# Altium PCB PRJ_0110_AAAA.PcbDoc (part 1 of 2)
Units mm, origin at the board's own origin, x right, y up, seen from the top; angles counter-clockwise.
Board outline 81.4 x 49.8 mm, 4 copper layers (Top Layer, Layer 2, Layer 3, Bottom Layer), stack 1.578 mm thick; 107 components, 59 nets, 281 pads, 261 vias.
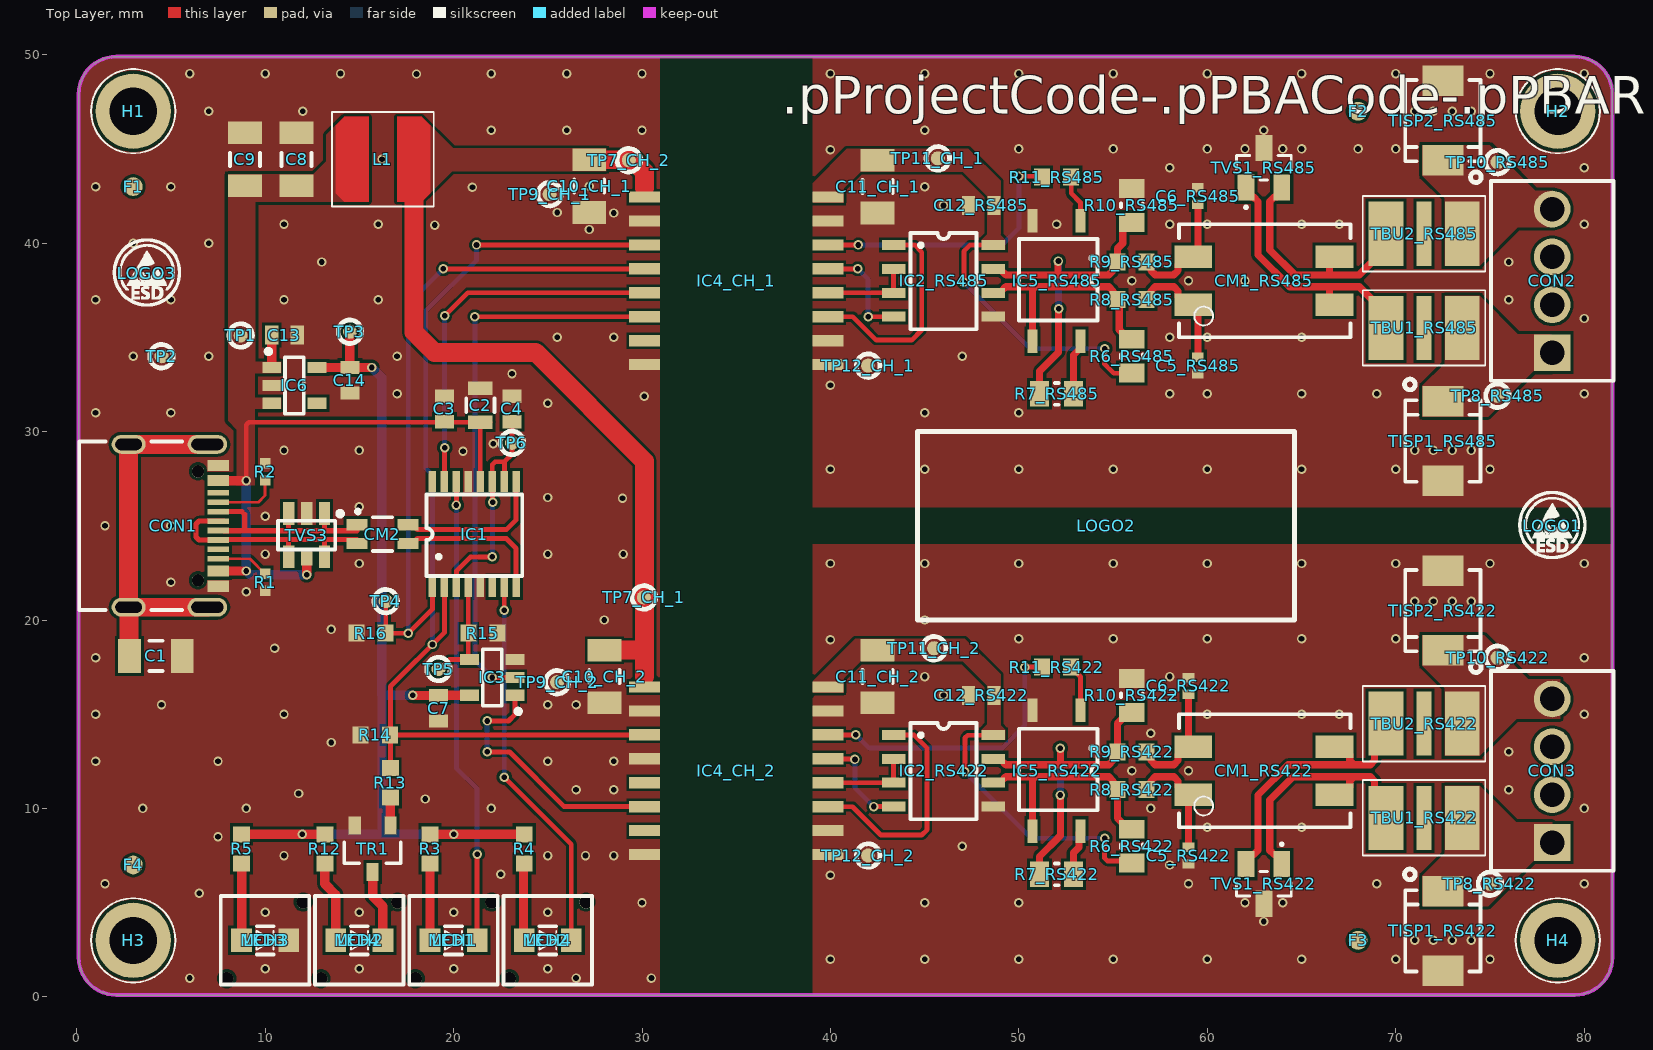
[diagram p0: Top Layer view]
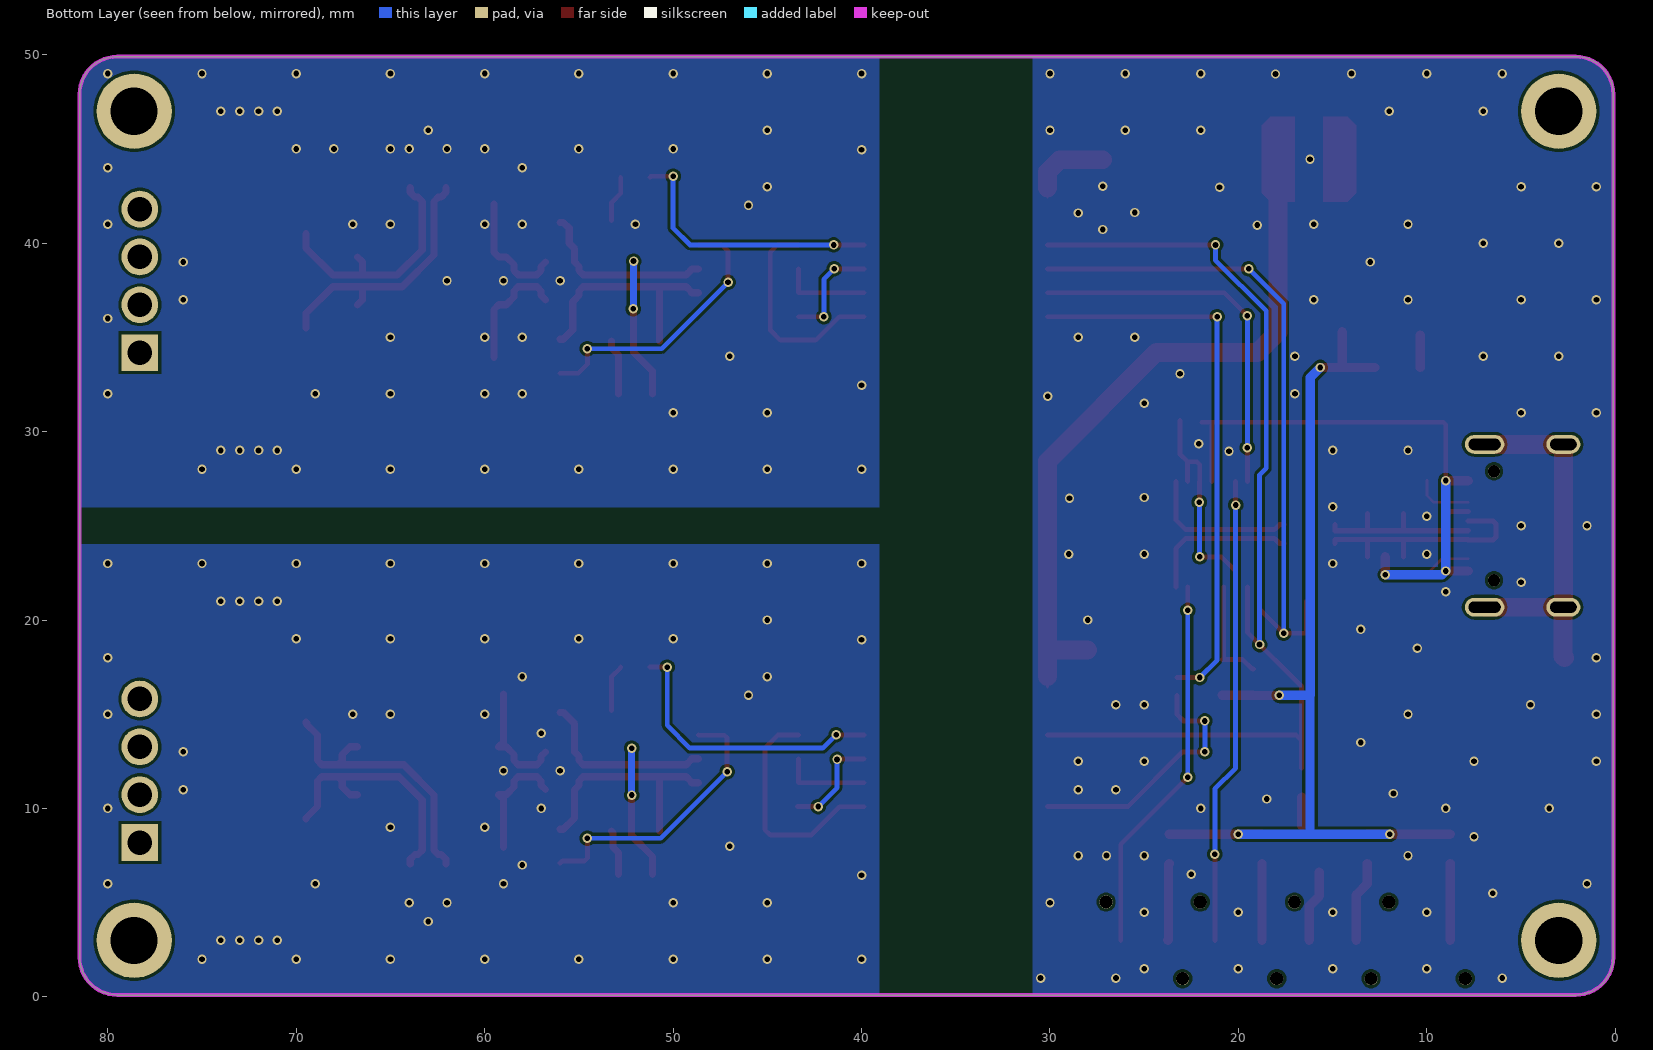
[diagram p1: Bottom Layer view, seen from below]
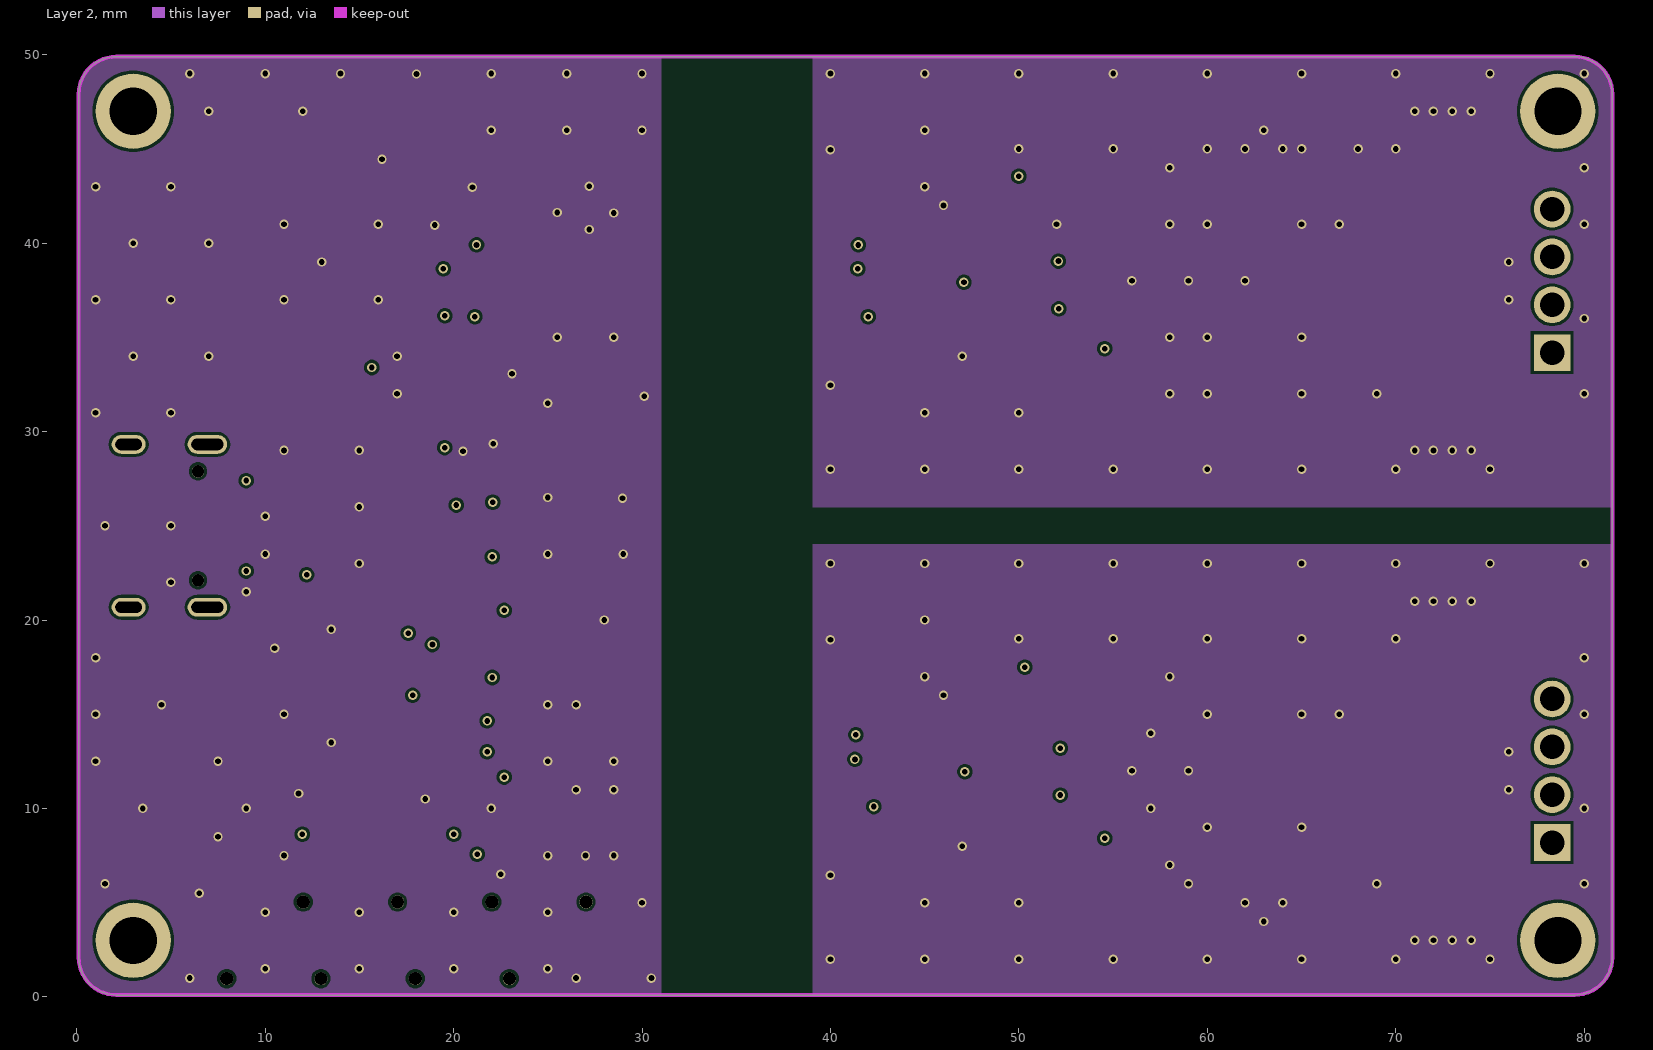
[diagram p2: Layer 2]
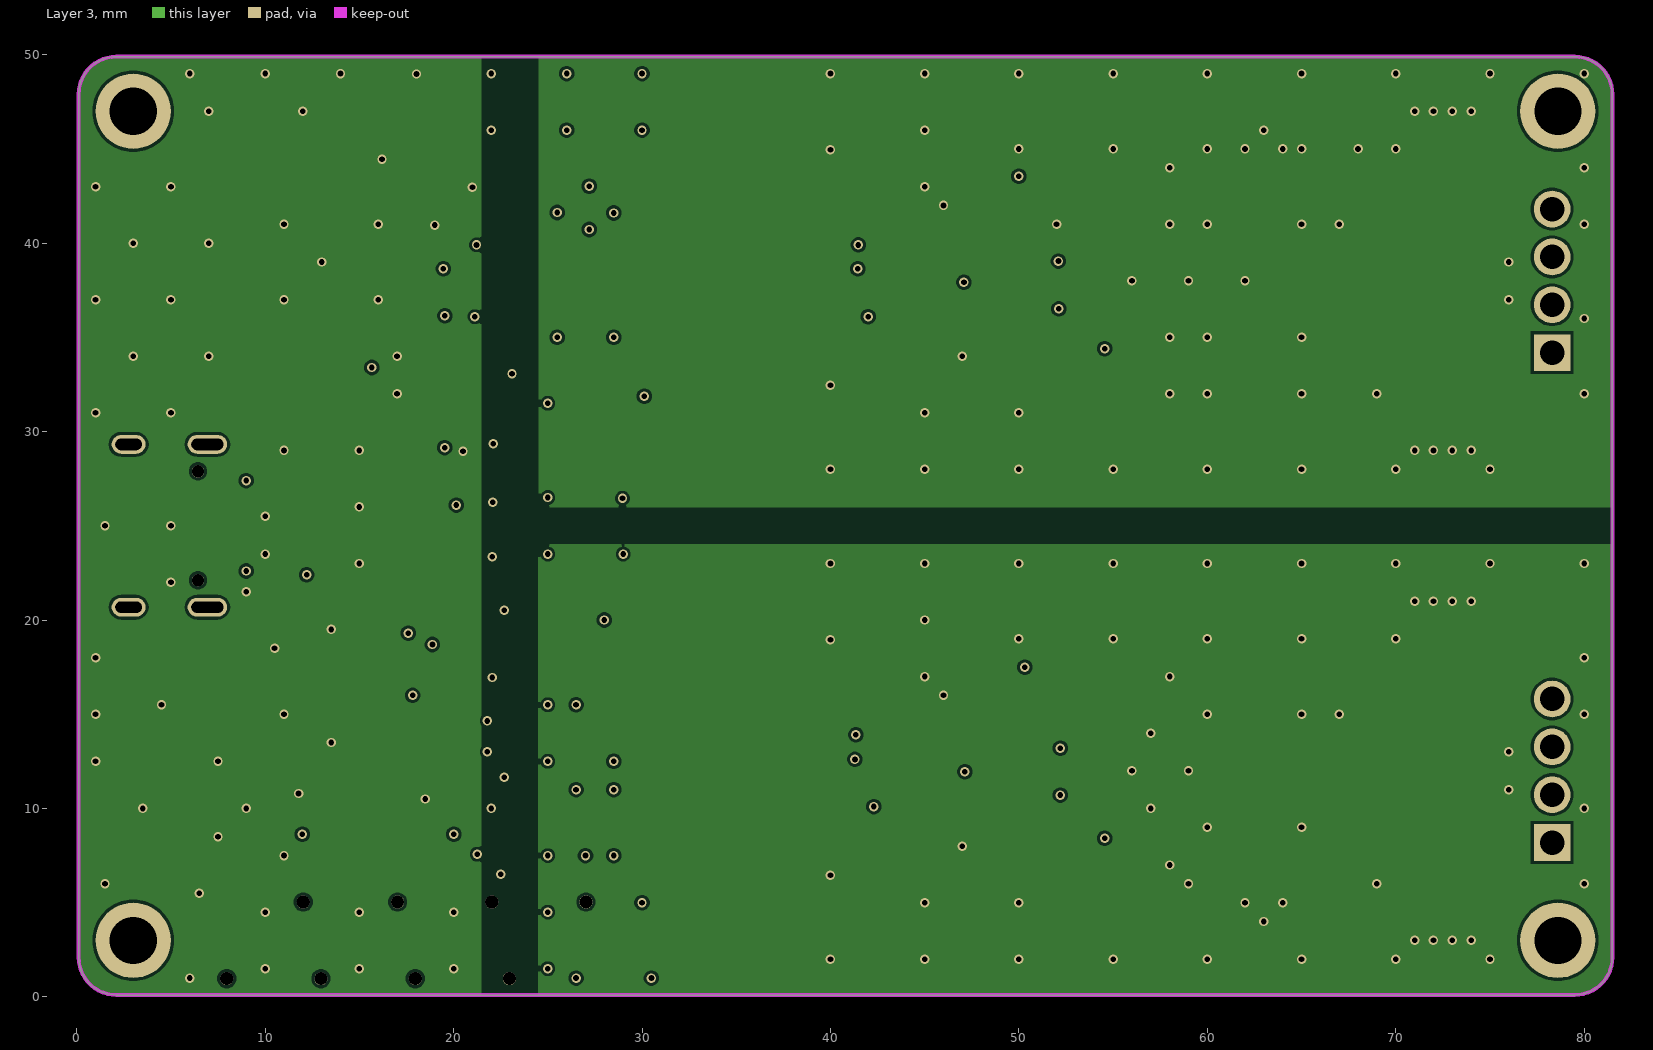
[diagram p3: Layer 3]
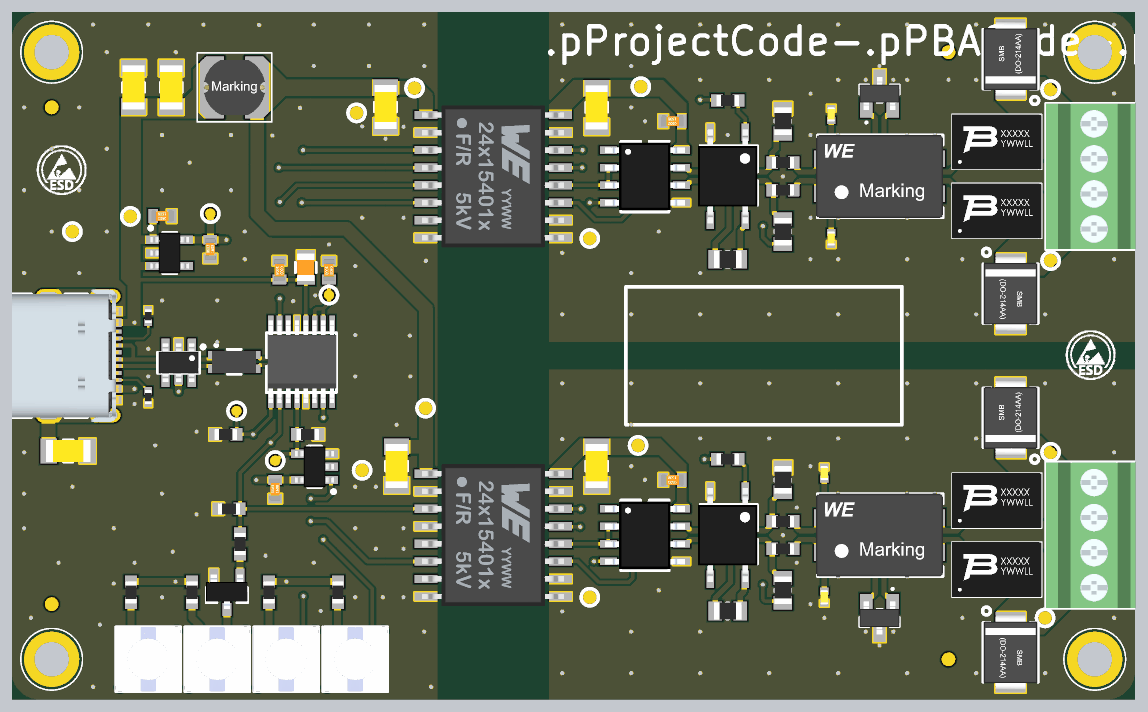
[diagram p5: 3D render of the assembled board from above, using the file's embedded part models]

## Layer stack, top to bottom
Top Solder: solder mask 0.0102, Solder Resist, Dk 3.5
Top Layer: signal copper 0.035
Dielectric 1: prepreg 0.107, PP-006, Dk 4.1
Dielectric 2: prepreg 0.0994, PP-006, Dk 4.1
Layer 2: signal copper 0.0152
Dielectric1: dielectric 1.065, FR-4, Dk 4.8
Layer 3: signal copper 0.0152
Dielectric 3: prepreg 0.0994, PP-006, Dk 4.1
Dielectric 4: prepreg 0.107, PP-006, Dk 4.1
Bottom Layer: signal copper 0.035
Bottom Solder: solder mask 0.0102, Solder Resist, Dk 3.5

## Board outline
0.1,2.1 ccw(c2.1,2.1) 2.1,0.1 79.5,0.1 ccw(c79.5,2.1) 81.5,2.1 81.5,47.9 ccw(c79.5,47.9) 79.5,49.9 2.1,49.9 ccw(c2.1,47.9) 0.1,47.9

## Design rules (kind name [scope] priority, off if disabled: settings)
Clearance [All] p1: gap=0.15 ignorepadtopadclearanceinfootprint=FALSE
DiffPairsRouting RS485_Rules [All] p1: maxlimit=0.254 minlimit=0.254 mostfreqgap=0.254 toplayer_minwidth=0.381 toplayer_maxwidth=0.381 toplayer_prefwidth=0.381 midlayer1_minwidth=0.381 midlayer1_maxwidth=0.381 midlayer1_prefwidth=0.381 midlayer2_minwidth=0.381 midlayer2_maxwidth=0.381 midlayer2_prefwidth=0.381 bottomlayer_minwidth=0.381 bottomlayer_maxwidth=0.381 bottomlayer_prefwidth=0.381 maxuncoupledlength=12.7
DiffPairsRouting USB_Rules [InDifferentialPairClass('USB')] p2: maxlimit=0.2 minlimit=0.2 mostfreqgap=0.2 toplayer_minwidth=0.27 toplayer_maxwidth=0.27 toplayer_prefwidth=0.27 midlayer1_minwidth=0.27 midlayer1_maxwidth=0.27 midlayer1_prefwidth=0.27 midlayer2_minwidth=0.27 midlayer2_maxwidth=0.27 midlayer2_prefwidth=0.27 bottomlayer_minwidth=0.27 bottomlayer_maxwidth=0.27 bottomlayer_prefwidth=0.27 maxuncoupledlength=12.7
FabricationTestPointUsage TestPointUsage [All] p1: valid=0 allowmultiple=FALSE
FabricationTestpoint Testpoint [All] p1: side=3 testpointundercomponent=TRUE minsize=1.016 maxsize=2.54 preferedsize=1.524 minholesize=0 maxholesize=1.016 preferedholesize=0.813 testpointgrid=0.025 allowsidetop=TRUE allowsidebottom=TRUE usegrid=TRUE gridtolerance=0
PlaneConnect [All] p1: planeconnectstyle=Direct reliefexpansion=0.508 reliefentries=4 reliefconductorwidth=0.254 reliefairgap=0.254
PolygonConnect [All] p1: connectstyle=Direct reliefconductorwidth=0.254 reliefentries=4 polygonreliefangle="90 Angle" airgapwidth=0.254
RoomDefinition RS485 [InComponentClass('RS485')] p1: confinementstyle=ConfineIn formatcopy=TRUE lockcomponents=FALSE outline -105.378,-92.424 -54.578,-92.424 -54.578,-67.024 -105.378,-67.024
RoomDefinition RS422 [InComponentClass('RS422')] p2: confinementstyle=ConfineIn formatcopy=TRUE lockcomponents=FALSE outline -105.378,-92.424 -54.578,-92.424 -54.578,-67.024 -105.378,-67.024
RoomDefinition "USB To UART" [InComponentClass('USB To UART')] p3: confinementstyle=ConfineIn formatcopy=TRUE lockcomponents=FALSE outline 118.777,-16.605 164.319,-16.605 164.319,-5.378 118.777,-5.378
RoutingLayers [All] p1: top layer_v5=TRUE mid layer 1_v5=FALSE mid layer 2_v5=FALSE bottom layer_v5=TRUE
RoutingVias [All] p1: holewidth=0.3 width=0.5 viastyle="Through Hole" minholewidth=0.3 minwidth=0.5 maxholewidth=0.711 maxwidth=1.27
SilkToSolderMaskClearance SilkscreenOverComponentPads [IsPad] p1: minsilkscreentomaskgap=0.254 clearancetoexposedcopper=TRUE
SolderMaskExpansion SolderMaskExpansion_1 [IsVia AND (HoleSize <= 0.3)] p1: expansion=0.102 istentingtop=TRUE
SolderMaskExpansion [All] p2: expansion=0.102 istentingtop=FALSE
Width [All] p1: maxlimit=1 minlimit=0.15 preferedwidth=0.254
24 further rules are at their usual default settings.

## Classes and differential pairs
channel class RS485: RS422 RS485
channel class Isolator: CH_1 CH_2
net class RS485: ___RS485_RS422_N ___RS485_RS422_P ___RS485_RS485_N ___RS485_RS485_P __RS485_RS422_N __RS485_RS422_P __RS485_RS485_N __RS485_RS485_P _RS485_RS422_N _RS485_RS422_P _RS485_RS485_N _RS485_RS485_P RS485_RS422_N RS485_RS422_P RS485_RS485_N RS485_RS485_P
net class DIFF90: _USB_D_N _USB_D_P USB_D_N USB_D_P
component class "USB To UART": C1 C2 C3 C4 C13 C14 CM2 CON1 IC1 IC6 LED1 LED2 LED3 LED4 MCH1 MCH2 MCH3 MCH4 R1 R2 R3 R4 R5 R12 R13 R14 R15 R16 TP1 TP2 TP3 TP4 TP5 TP6 TR1 TVS3
component class RS485: C5_RS485 C6_RS485 C12_RS485 CM1_RS485 IC2_RS485 IC5_RS485 R6_RS485 R7_RS485 R8_RS485 R9_RS485 R10_RS485 R11_RS485 TBU1_RS485 TBU2_RS485 TISP1_RS485 TISP2_RS485 TP8_RS485 TP10_RS485 TVS1_RS485
component class RS422: C5_RS422 C6_RS422 C12_RS422 CM1_RS422 IC2_RS422 IC5_RS422 R6_RS422 R7_RS422 R8_RS422 R9_RS422 R10_RS422 R11_RS422 TBU1_RS422 TBU2_RS422 TISP1_RS422 TISP2_RS422 TP8_RS422 TP10_RS422 TVS1_RS422
component class CH_1: C10_CH_1 C11_CH_1 IC4_CH_1 TP7_CH_1 TP9_CH_1 TP11_CH_1 TP12_CH_1
component class CH_2: C10_CH_2 C11_CH_2 IC4_CH_2 TP7_CH_2 TP9_CH_2 TP11_CH_2 TP12_CH_2
component class Main: C7 C8 C9 CON2 CON3 F1 F2 F3 F4 H1 H2 H3 H4 IC3 L1 LOGO1 LOGO2 LOGO3 PCB1
differential pair ___RS485_RS485: +__RS485_RS485_P -__RS485_RS485_N
differential pair ___RS485_RS422: +__RS485_RS422_P -__RS485_RS422_N
differential pair RS485_RS485: +RS485_RS485_P -RS485_RS485_N
differential pair RS485_RS422: +RS485_RS422_P -RS485_RS422_N
differential pair _RS485_RS485: +_RS485_RS485_P -_RS485_RS485_N
differential pair _RS485_RS422: +_RS485_RS422_P -_RS485_RS422_N
differential pair __RS485_RS485: +___RS485_RS485_P -___RS485_RS485_N
differential pair __RS485_RS422: +___RS485_RS422_P -___RS485_RS422_N
differential pair USB_D: +USB_D_P -USB_D_N
differential pair _USB_D: +_USB_D_P -_USB_D_N

## Components (designator, comment, footprint, x,y, rotation, side; value= is the part's Value field where it differs from the comment)
C1 "1nF" C1206 4.2,18.1 r180 top value=1000
C2 "10uF" C0805 21.418,31.4 r270 top value=10000000
C3 "100nF" C0603 19.513,31.2 r270 top value=100000
C4 "100nF" C0603 23.1,31.2 r270 top value=100000
C5_RS422 "10pF" C0402 59,7.5 r270 top value=10 (schematic designator C5)
C5_RS485 "10pF" C0402 59.5,33.5 r270 top value=10 (schematic designator C5)
C6_RS422 "10pF" C0402 59,16.5 r270 top value=10 (schematic designator C6)
C6_RS485 "10pF" C0402 59.5,42.5 r270 top value=10 (schematic designator C6)
C7 "100nF" C0603 19.2,15.32 r90 top value=100000
C8 "10UF" c1206 11.665,44.45 r270 top value=10000000
C9 "10UF" c1206 8.931,44.45 r270 top value=10000000
C10_CH_1 "10UF" c1206 27.2,43.025 r90 top value=10000000 (schematic designator C10)
C10_CH_2 "10UF" c1206 28,17 r90 top value=10000000 (schematic designator C10)
C11_CH_1 "10UF" c1206 42.5,43 r90 top value=10000000 (schematic designator C11)
C11_CH_2 "10UF" c1206 42.5,17 r90 top value=10000000 (schematic designator C11)
C12_RS422 "100nF" C0603 48,16 r180 top value=100000 (schematic designator C12)
C12_RS485 "100nF" C0603 48,42 r180 top value=100000 (schematic designator C12)
C13 "1uF" C0603 11.025,35.125 r180 top value=1000000
C14 "1uF" C0603 14.5,32.725 r90 top value=1000000
CM1_RS422 "744222" WE-SL2_74422 63,12 r0 top value=1mH (schematic designator CM1)
CM1_RS485 "744222" WE-SL2_74422 63,38 r0 top value=1mH (schematic designator CM1)
CM2 "744232090" WE-CNSW_1206 16.225,24.559 r0 top value=3.3H
CON1 "629722000214" 629722000214 3.9,25 r270 top
CON2 "691210910004" 691210910004 78.3,38 r90 top
CON3 "691210910004" 691210910004 78.3,12 r90 top
F1 "1mm Fiducial" "1mm Fiducial" 3,43 r0 top
F2 "1mm Fiducial" "1mm Fiducial" 68,47 r0 top
F3 "1mm Fiducial" "1mm Fiducial" 68,3 r0 top
F4 "1mm Fiducial" "1mm Fiducial" 3,7 r0 top
H1 "2.5mm" "2.5mm hole" 3,47 r0 top locked
H2 "2.5mm" "2.5mm hole" 78.6,47 r0 top locked
H3 "2.5mm" "2.5mm hole" 3,3 r0 top locked
H4 "2.5mm" "2.5mm hole" 78.6,3 r0 top locked
IC1 "FT230XS-U" SSOP-16 21.1,24.559 r90 top
IC2_RS422 "ADM3065EARZ-R7" SO08 46,12 r0 top (schematic designator IC2)
IC2_RS485 "ADM3065EARZ-R7" SO08 46,38 r0 top (schematic designator IC2)
IC3 "MC74VHC1G08DTT1G" SOT23-5 22.053,16.95 r180 top
IC4_CH_1 "18024115401H" WPME-CDIP_SOIC-16WB 35,38 r270 top (schematic designator IC4)
IC4_CH_2 "18024115401H" WPME-CDIP_SOIC-16WB 35,12 r270 top (schematic designator IC4)
IC5_RS422 "VO1400AEFTR" SOP-4 52,12 r270 top (schematic designator IC5)
IC5_RS485 "VO1400AEFTR" SOP-4 52,38 r270 top (schematic designator IC5)
IC6 "LP5907MFX-3.3/NOPB" SOT23-5 11.55,32.45 r0 top
L1 "4.7 uH 1.82A" WE-PD2_4532 16.25,44.45 r0 top value=4.7µH
LED1 "LTST-C171GKT" 0805_green 20,3 r0 top
LED2 "LTST-C171KRKT" 0805_RED 25,3 r0 top
LED3 "LTST-C171TBKT" 0805_blue 10,3 r0 top
LED4 "LTST-C171KRKT" 0805_RED 15,3 r0 top
LOGO1 "ESD" ESD 78.3,25 r0 top
LOGO2 "Etiket" ETIKET 54.624,25 r180 top
LOGO3 "ESD" ESD 3.723,38.408 r0 top
MCH1 "VLP-400-F" VLP-400-F 20,3 r0 top
MCH2 "VLP-400-F" VLP-400-F 15,3 r0 top
MCH3 "VLP-400-F" VLP-400-F 10,3 r0 top
MCH4 "VLP-400-F" VLP-400-F 25,3 r0 top
PCB1 "PRJ_01101" PCB 84.822,24.576 r90 top
R1 "5.1K" R0402 10,22 r90 top value=5100
R2 "5.1K" R0402 10,27.865 r270 top value=5100
R3 "220R" R0603 18.75,7.855 r90 top value=220
R4 "220R" R0603 23.75,7.855 r90 top value=220
R5 "220R" R0603 8.75,7.855 r90 top value=220
R6_RS422 "1K" R0805 56,8 r270 top value=1000 (schematic designator R6)
R6_RS485 "1K" R0805 56,34 r270 top value=1000 (schematic designator R6)
R7_RS422 "120R" R0805 52,6.5 r180 top value=120 (schematic designator R7)
R7_RS485 "120R" R0805 52,32 r180 top value=120 (schematic designator R7)
R8_RS422 "0R" R0603 56,11 r0 top value=0 (schematic designator R8)
R8_RS485 "0R" R0603 56,37 r0 top value=0 (schematic designator R8)
R9_RS422 "0R" R0603 56,13 r0 top value=0 (schematic designator R9)
R9_RS485 "0R" R0603 56,39 r0 top value=0 (schematic designator R9)
R10_RS422 "1K" R0805 56,16 r270 top value=1000 (schematic designator R10)
R10_RS485 "1K" R0805 56,42 r270 top value=1000 (schematic designator R10)
R11_RS422 "400R" R0603 52,17.5 r0 top value=400 (schematic designator R11)
R11_RS485 "400R" R0603 52,43.5 r0 top value=400 (schematic designator R11)
R12 "220R" R0603 13.169,7.855 r90 top value=220
R13 "10K" R0603 16.65,11.365 r270 top value=10000
R14 "10K" R0603 15.842,13.905 r0 top value=10000
R15 "10K" R0603 21.558,19.3 r180 top value=10000
R16 "10K" R0603 15.614,19.3 r0 top value=10000
TBU1_RS422 "TBU-CA065-200-WH" TBU-CA065-200-WH 71.5,9.5 r0 top value=8.6Ω (schematic designator TBU1)
TBU1_RS485 "TBU-CA065-200-WH" TBU-CA065-200-WH 71.5,35.5 r0 top value=8.6Ω (schematic designator TBU1)
TBU2_RS422 "TBU-CA065-200-WH" TBU-CA065-200-WH 71.5,14.5 r0 top value=8.6Ω (schematic designator TBU2)
TBU2_RS485 "TBU-CA065-200-WH" TBU-CA065-200-WH 71.5,40.5 r0 top value=8.6Ω (schematic designator TBU2)
TISP1_RS422 "TISP4240M3BJR-S" SMB/DO-214AA 72.5,3.5 r90 top value=50pF (schematic designator TISP1)
TISP1_RS485 "TISP4240M3BJR-S" SMB/DO-214AA 72.5,29.5 r90 top value=50pF (schematic designator TISP1)
TISP2_RS422 "TISP4240M3BJR-S" SMB/DO-214AA 72.5,20.5 r270 top value=50pF (schematic designator TISP2)
TISP2_RS485 "TISP4240M3BJR-S" SMB/DO-214AA 72.5,46.5 r270 top value=50pF (schematic designator TISP2)
TP1 "TestPoint1" SMD_1MMPOINT 8.7,35.1 r90 top
TP2 "TestPoint1" SMD_1MMPOINT 4.5,34 r90 top
TP3 "TestPoint1" SMD_1MMPOINT 14.5,35.3 r90 top
TP4 "TestPoint1" SMD_1MMPOINT 16.4,21 r90 top
TP5 "TestPoint1" SMD_1MMPOINT 19.2,17.4 r90 top
TP6 "TestPoint1" SMD_1MMPOINT 23.1,29.4 r90 top
TP7_CH_1 "TestPoint1" SMD_1MMPOINT 30.1,21.2 r90 top (schematic designator TP7)
TP7_CH_2 "TestPoint1" SMD_1MMPOINT 29.3,44.4 r90 top (schematic designator TP7)
TP8_RS422 "TestPoint1" SMD_1MMPOINT 75,6 r90 top (schematic designator TP8)
TP8_RS485 "TestPoint1" SMD_1MMPOINT 75.4,31.9 r90 top (schematic designator TP8)
TP9_CH_1 "TestPoint1" SMD_1MMPOINT 25.1,42.6 r90 top (schematic designator TP9)
TP9_CH_2 "TestPoint1" SMD_1MMPOINT 25.5,16.7 r90 top (schematic designator TP9)
TP10_RS422 "TestPoint1" SMD_1MMPOINT 75.4,18 r90 top (schematic designator TP10)
TP10_RS485 "TestPoint1" SMD_1MMPOINT 75.4,44.3 r90 top (schematic designator TP10)
TP11_CH_1 "TestPoint1" SMD_1MMPOINT 45.7,44.5 r90 top (schematic designator TP11)
TP11_CH_2 "TestPoint1" SMD_1MMPOINT 45.5,18.5 r90 top (schematic designator TP11)
TP12_CH_1 "TestPoint1" SMD_1MMPOINT 42,33.5 r90 top (schematic designator TP12)
TP12_CH_2 "TestPoint1" SMD_1MMPOINT 42,7.5 r90 top (schematic designator TP12)
TR1 "BC847,215" SOT23-3 15.7,7.855 r270 top
TVS1_RS422 "SM712.TCT" WE-TVS_SOT23-3L 63,6 r180 top (schematic designator TVS1)
TVS1_RS485 "SM712.TCT" WE-TVS_SOT23-3L 63,44 r0 top (schematic designator TVS1)
TVS3 "824015" SOT-23-6 12.2,24.5 r180 top

## Footprints (in the part's own frame and the unit in brackets; to place one, negate y for a bottom-side part, rotate by r counter-clockwise, add the part's x,y. Pads: shape width x height; smd on the part's side, far side on the other; paste and mask are expansions set on the pad)
"1mm Fiducial" [mm] "1mm Fiducial"
  round 1 smd paste-2539.97: 1(0,0)
"2.5mm hole" [mm]
  round 4 hole 2.5 mask+0: 1(0,0)
  silkscreen extent -2.24,-2.23 2.24,2.23
0805_blue [mm]
  rect 1.1x1.25 smd: 1(-1.25,0) 2(1.25,0)
  silkscreen extent -0.45,-0.75 0.45,0.75, body extent -1.05,-0.68 1.05,0.67, height 0.81
0805_green [mm]
  rect 1.1x1.25 smd: 1(-1.25,0) 2(1.25,0)
  silkscreen extent -0.45,-0.75 0.45,0.75, body extent -1.01,-0.62 1.01,0.62, height 1.11
0805_RED [mm]
  rect 1.1x1.25 smd: 1(-1.25,0) 2(1.25,0)
  silkscreen extent -0.45,-0.75 0.45,0.75, body extent -1.05,-0.68 1.05,0.67, height 0.92
629722000214 [mm] "USB TYPE C VERTICAL PLUG"
  rect 0.6x1.14 smd: A1/B12(-3.2,3.605) A4/B9(-2.4,3.605) A9/B4(2.4,3.605) A12/B1(3.2,3.605)
  rect 0.3x1.14 smd: A5(-1.25,3.605) A6(-0.25,3.605) A7(0.25,3.605) A8(1.25,3.605) B5(1.75,3.605) B6(0.75,3.605) B7(-0.75,3.605) B8(-1.75,3.605)
  round 0.65 hole 0.65 unplated: MH1(-2.89,2.535) MH2(2.89,2.535)
  oval 1x2.1 hole 0.6 slot 1.7 at 90 deg: Shell(-4.32,3.035) Shell(4.32,3.035)
  oval 1x1.8 hole 0.6 slot 1.4 at 90 deg: Shell(-4.32,-1.145) Shell(4.32,-1.145)
  silkscreen extent -4.47,-3.76 4.47,1.7, body extent -4.79,-3.76 4.79,3.95, height 3.33
691210910004 [mm]
  rect 1.95x1.95 hole 1.3: 1(-3.81,0)
  round 1.95 hole 1.3: 2(-1.27,0) 3(1.27,0) 4(3.81,0)
  silkscreen extent -5.3,-3.25 5.3,3.25, body extent -5.28,-3.25 5.28,3.25, height 8.51
C0402 [mm] "Chip Capacitor, 2-Leads, Body 1.00x0.50mm, IPC Medium Density"
  rect 0.5x0.62 smd: 1(-0.44,0) 2(0.44,0)
  body extent -0.53,-0.28 0.53,0.28, height 0.55
C0603 [mm] "Chip Capacitor, 2-Leads, Body 1.60x0.80mm, IPC Medium Density"
  rect 0.7x1 smd: 1(-0.675,0) 2(0.675,0)
  body extent -0.8,-0.4 0.8,0.4, height 0.8
C0805 [mm]
  rect 0.7x1.3 smd: 1(-0.9,0) 2(0.9,0)
  silkscreen extent -0.38,-0.75 0.38,0.75, body extent -1,-0.62 1,0.62, height 0.81
C1206 [mm] "Chip Capacitor, 2-Leads, Body 3.20x1.60mm, IPC Medium Density"
  rect 1.2x1.8 smd: 1(-1.4,0) 2(1.4,0)
  silkscreen extent -0.35,-0.8 0.35,0.8, body extent -1.6,-0.8 1.6,0.8, height 1.31
c1206 [mm] "Chip Capacitor, 2-Leads, Body 3.20x1.60mm, IPC Medium Density"
  rect 1.2x1.8 smd: 1(-1.4,0) 2(1.4,0)
  silkscreen extent -0.35,-0.8 0.35,0.8, body extent -1.6,-0.8 1.6,0.8, height 1.31
ESD [mm]
  silkscreen extent -1.8,-1.73 1.8,1.83
ETIKET [mm]
  silkscreen extent -10,-5 10,5
PCB [mm]
R0402 [mm] "Chip Resistor, 2-Leads, Body 1.00x0.50mm, IPC Medium Density"
  rect 0.55x0.55 smd: 1(-0.45,0) 2(0.45,0)
  body extent -0.5,-0.25 0.5,0.25, height 0.36
R0603 [mm] "Chip Resistor, 2-Leads, Body 1.60x0.80mm, IPC Medium Density"
  rect 0.85x0.9 smd: 1(-0.775,0) 2(0.775,0)
  body extent -0.8,-0.4 0.8,0.4, height 0.46
R0805 [mm] "Chip Resistor, 2-Leads, Body 2.00x1.25mm, IPC Medium Density"
  rect 1x1.35 smd: 1(-0.9,0) 2(0.9,0)
  silkscreen extent -0.1,-0.58 0.1,0.58, body extent -1,-0.63 1,0.62, height 0.61
SMB/DO-214AA [mm]
  rect 1.62x2.18 smd: 1(-2.11,0) 2(2.11,0)
  silkscreen extent -2.16,-2 3.28,2.03, body extent -2.75,-1.95 2.75,1.95, height 2.45
SMD_1MMPOINT [mm]
  round 0.75 smd paste-2539.97: 1(0,0)
  silkscreen extent -0.62,-0.63 0.62,0.62
SO08 [mm]
  rect 1.25x0.53 smd: 1(-2.65,1.905) 2(-2.65,0.635) 3(-2.65,-0.635) 4(-2.65,-1.905) 5(2.65,-1.905) 6(2.65,-0.635) 7(2.65,0.635) 8(2.65,1.905)
  silkscreen extent -1.75,-2.58 1.75,2.54, body extent -2.89,-2.45 2.89,2.45, height 1.46
SOP-4 [mm]
  rect 1.25x0.53 smd: 1(-3.2,1.27) 2(-3.2,-1.27) 3(3.2,-1.27) 4(3.2,1.27)
  silkscreen extent -2.22,-2 2.1,2.16, body extent -3.4,-2.15 3.4,2.15, height 2.11
SOT23-3 [mm] "SOT23, 3-Leads, Body 2.92x2.51mm, Pitch 0.95mm, IPC Medium Density"
  rect 0.95x0.65 smd: 1(-1.235,0.95) 2(-1.235,-0.95) 3(1.235,0)
  silkscreen extent -0.34,-1.5 0.76,1.5, body extent -1.28,-1.5 1.22,1.5, height 1.11
SOT23-5 [mm] "SOT23, 6-Leads, Body 2.73x2.80mm, Pitch 0.95mm, IPC Medium Density"
  rect 1x0.6 smd: 1(-1.2,0.95) 2(-1.2,0) 3(-1.2,-0.95) 4(1.2,-0.95) 5(1.2,0.95)
  silkscreen extent -1.5,-1.5 0.5,1.92, body extent -1.4,-1.5 1.4,1.5, height 1.11
SOT-23-6 [mm]
  rect 0.6x1.2 smd: 1(-0.95,-1.15) 2(0,-1.15) 3(0.95,-1.15) 4(0.95,1.15) 6(-0.95,1.15)
  rect 0.6x0.9 smd: 5(0,1.15)
  silkscreen extent -1.91,-1.27 1.52,0.76, body extent -1.45,-1.4 1.45,1.4, height 1.45
SSOP-16 [mm]
  rect 1.1x0.4 smd: 1(-2.794,2.222) 2(-2.794,1.587) 3(-2.794,0.952) 4(-2.794,0.317) 5(-2.794,-0.318) 6(-2.794,-0.953) 7(-2.794,-1.588) 8(-2.794,-2.222) 9(2.794,-2.222) 10(2.794,-1.587) 11(2.794,-0.952) 12(2.794,-0.317) 13(2.794,0.318) 14(2.794,0.953) 15(2.794,1.588) 16(2.794,2.222)
  silkscreen extent -2.22,-2.54 2.1,2.54, body extent -3,-2.53 3,2.45, height 1.01
TBU-CA065-200-WH [mm] "Chip Resistor, 2-Leads, Body 1.00x0.50mm, IPC Medium Density"
  rect 0.8x3.4 smd: 0(0,0)
  rect 1.85x3.4 smd: 1(-2.025,0) 2(2.025,0)
  silkscreen extent -3.25,-2 3.25,2, body extent -3.25,-2 3.25,2, height 0.89
VLP-400-F [mm]
  round 0.7 hole 0.7 unplated: 1(-2.038,-2.032) 1(2.026,2.032)
  silkscreen extent -2.36,-2.35 2.35,2.35, body extent -2.36,-2.35 2.35,2.35, height 10.17
WE-CNSW_1206 [mm] "SMT Common Mode Line Filter, 4-leads, body 3.2x1.6mm"
  rect 1.1x0.6 smd: 1(-1.35,0.5) 2(1.35,0.5) 3(1.35,-0.5) 4(-1.35,-0.5)
  silkscreen extent -1.4,-0.9 0.5,1.3, body extent -1.6,-0.8 1.6,0.8, height 1.79
WE-PD2_4532 [mil]
  round 1 smd: 1(-63.98,-0.01) 2(63.98,0)
  Top Layer region: 98.43,-71.36 81.2,-88.58 29.53,-88.58 29.53,88.58 81.2,88.58 98.43,71.36
  Top Layer region: -98.43,71.35 -81.21,88.58 -29.53,88.58 -29.53,-88.59 -81.21,-88.59 -98.43,-71.36
  silkscreen extent -106,-98 106,98, body extent -88,-79 88,79, height 126
WE-SL2_74422 [mm] "SMD Inductor, Body 8.7x10mm"
  rect 2x1.2 smd: 1(-3.75,1.27) 2(-3.75,-1.27) 3(3.75,-1.27) 4(3.75,1.27)
  silkscreen extent -4.5,-3 4.6,3, body extent -4.6,-3 4.6,3, height 5.01
WE-TVS_SOT23-3L [mm] "TVS Diode, package SOT23-3L"
  rect 0.9x1.4 smd: 1(-0.95,-1.05) 2(0.95,-1.05) 3(0,1.05)
  silkscreen extent -1.45,-2.17 1.45,0.65, body extent -1.45,-1.2 1.45,1.2, height 1.04
WPME-CDIP_SOIC-16WB [mm]
  rect 0.6x1.65 smd: 1(-4.445,-4.875) 2(-3.175,-4.875) 3(-1.905,-4.875) 4(-0.635,-4.875) 5(0.635,-4.875) 6(1.905,-4.875) 7(3.175,-4.875) 8(4.445,-4.875) 9(4.445,4.875) 10(3.175,4.875) 11(1.905,4.875) 12(0.635,4.875) 13(-0.635,4.875) 14(-1.905,4.875) 15(-3.175,4.875) 16(-4.445,4.875)
  body extent -5.15,-5.15 5.15,5.15, height 2.5

## Part data
C1: library part CS1206KKX7RDBB102, "1nF, 2kV, X7R, 1206", Case Code (Metric)=3216, Case Code (Imperial)=1206, Dielectric=X7R, Dielectric Material=Ceramic, Manufacturer=Yageo, Max Operating Temperature=125°C, Min Operating Temperature=-55°C, Supplier Part Number 1=13-CS1206KKX7RDBB102TR-ND, Tolerance=10%, Voltage Rating=2000V, Working Voltage=0, Case/Package=1206, Category=CAPASITOR, Height=1.45mm, Local Supplier=GENERAL, Manufacturer Part Number=CS1206KKX7RDBB102, Mount=SMD, Price 10K=0.5, Purpose Of Usage=BASIC, RoHS=YES, Stock ID=??, Sub-Category=CERAMIC, Supplier 1=Digi-Key, Voltage Rating (DC)=2000V
C2: library part CC0805KFX7R6BB106, "10uF ,10V ,X7R ,0805", Case Code (Metric)=2012, Case Code (Imperial)=0805, Dielectric=X7R, Dielectric Material=Ceramic, Manufacturer=Yageo, Max Operating Temperature=125°C, Min Operating Temperature=-55°C, Supplier Part Number 1=13-CC0805KFX7R6BB106CT-ND, Tolerance=10%, Voltage Rating=10V, Working Voltage=0, Case/Package=0805, Category=CAPASITOR, Local Supplier=GENERAL, Manufacturer Part Number=CC0805KFX7R6BB106, Mount=SMD, Price 10K=0.00250, Purpose Of Usage=BASIC, RoHS=YES, Stock ID=??, Sub-Category=CERAMIC, Supplier 1=Digi-Key, Voltage Rating (DC)=10V
C3 C4 C7 C12_RS422 C12_RS485: library part CC0603KRX7R8BB104, "100nF, 25V, X7R, 0603", Case Code (Metric)=1608, Case Code (Imperial)=0603, Dielectric=X7R, Dielectric Material=Ceramic, Manufacturer=Yageo, Max Operating Temperature=125°C, Min Operating Temperature=-55°C, Supplier Part Number 1=311-1341-1-ND, Tolerance=10%, Voltage Rating=25V, Working Voltage=0, Case/Package=0603, Category=CAPASITOR, Height=0.8mm, Local Supplier=GENERAL, Manufacturer Part Number=CC0603KRX7R8BB104, Mount=SMD, Price 10K=0.00250, Purpose Of Usage=BASIC, RoHS=YES, Stock ID=??, Sub-Category=CERAMIC, Supplier 1=Digi-Key, Voltage Rating (DC)=25V
C5_RS422 C5_RS485 C6_RS422 C6_RS485: library part CC0402JRNPO9BN100, "10pF, 50V, NP0, 0402", Case Code (Metric)=1005, Case Code (Imperial)=0402, Dielectric=C0G, Dielectric Material=Ceramic, Manufacturer=Yageo, Max Operating Temperature=125°C, Min Operating Temperature=-55°C, Supplier Part Number 1=311-1014-2-ND, Temperature Coefficient=30ppm/°C, Tolerance=5%, Voltage Rating=50V, Working Voltage=0, Case/Package=0402, Category=CAPASITOR, Height=0.5mm, Local Supplier=GENERAL, Manufacturer Part Number=CC0402JRNPO9BN100, Mount=SMD, Price 10K=0.00250, Purpose Of Usage=BASIC, RoHS=YES, Stock ID=??, Sub-Category=CERAMIC, Supplier 1=Digi-Key, Voltage Rating (DC)=50V
C8 C9 C10_CH_1 C10_CH_2 C11_CH_1 C11_CH_2: library part CL31B106MOHNNNE, "10UF, 16V, X7R, 1206", Case Code (Metric)=3216, Case Code (Imperial)=1206, Dielectric=X7R, Dielectric Material=Ceramic, Manufacturer=Samsung, Max Operating Temperature=125°C, Min Operating Temperature=-55°C, Supplier Part Number 1=1276-6641-1-ND, Tolerance=20%, Voltage Rating=16V, Working Voltage=0, Case/Package=1206, Category=CAPASITOR, Local Supplier=GENERAL, Manufacturer Part Number=CL31B106MOHNNNE, Mount=SMD, Price 10K=0.00250, Purpose Of Usage=BASIC, RoHS=YES, Stock ID=??, Sub-Category=CERAMIC, Supplier 1=Digi-Key, Voltage Rating (DC)=16V
C13 C14: library part CC0603KRX7R9BB105, "1uF, 50V, X7R, 0603", Case Code (Metric)=1608, Case Code (Imperial)=0603, Dielectric=X7R, Dielectric Material=Ceramic, Manufacturer=Yageo, Max Operating Temperature=125°C, Min Operating Temperature=-55°C, Supplier Part Number 1=311-2082-2-ND, Tolerance=10%, Voltage Rating=50V, Working Voltage=0, Case/Package=0603, Category=CAPASITOR, Height=0.95mm, Local Supplier=GENERAL, Manufacturer Part Number=CC0603KRX7R9BB105, Mount=SMD, MSL=1, Price 10K=0.00250, Purpose Of Usage=BASIC, RoHS=YES, Stock ID=??, Sub-Category=CERAMIC, Supplier 1=Digi-Key, Voltage Rating (DC)=50V
CM1_RS422 CM1_RS485: "Common Mode Chokes Dual 1000uH 6kOhm 100kHz 0.8A 0.207Ohm DCR SMD T/R Automotive AEC-Q200", Ambient Temperature Range High=85°C, Ambient Temperature Range Low=-40°C, Case/Package=SMD/SMT, Current Rating=800mA, DC Resistance (DCR)=310mΩ, Manufacturer="Wurth Elektronik", Max Operating Temperature=125°C, Supplier Part Number 1=732-1485-1-ND, Test Frequency=100kHz, Inductance Tolerance=50%, Category=INDUCTORS, Height=5mm, Length=9.2mm, Manufacturer Part Number=744222, Max DC Current=800mA, Min Operating Temperature=-40°C, Mount=SMD, Purpose Of Usage=BASIC, RoHS=YES, Shielding=Shielded, Stock ID=??, Sub-Category="COMMON MODE CHOKES", Supplier 1=Digi-Key, Impedance=6kΩ
CM2: "Common Mode Chokes Dual 90Ohm 100MHz 370mA SMD T/R", Case/Package=SMD/SMT, Current Rating=370mA, DC Resistance (DCR)=300mR, Manufacturer="Wurth Electronics", Max Operating Temperature=125°C, Min Operating Temperature=-40°C, Supplier Part Number 1=732-1469-1-ND, Inductance Tolerance=25%, Category=INDUCTORS, Length=3.2mm, Manufacturer Part Number=744232090, Mount=SMD, Purpose Of Usage=BASIC, RoHS=YES, Stock ID=??, Sub-Category="COMMON MODE CHOKES", Supplier 1=Digi-Key
CON1: "Wr-com_usb 2.0_TYPE C_horizontal", Manufacturer="Wurth Elektronik", Max Operating Temperature=85°C, Min Operating Temperature=-40°C, Supplier Part Number 1=732-629722000214TR-ND, Category=CONNECTORS, Gender=Receptacle, Local Supplier=WURTH, Manufacturer Part Number=629722000214, Mount=SMD, Number of Contacts=16, Orientation="Right Angle", Purpose Of Usage=BASIC, RoHS=Yes, Stock ID=??, Sub-Category="USB Type-C", Supplier 1=Digi-Key
CON2 CON3: "WR-TBL Terminal block - Rising Cage - THT", Color=Green, Current Rating=6A, Manufacturer="Wurth Elektronik", Max Operating Temperature=105°C, Min Operating Temperature=-40°C, Supplier Part Number 1=732-691210910004-ND, Category=CONNECTORS, Gender=Male, Length=10.56mm, Local Supplier=WURTH, Manufacturer Part Number=691210910004, Mount=SMD, Number of Contacts=4, Pitch=2.54mm, Purpose Of Usage=BASIC, RoHS=Compliant, Stock ID=??, Sub-Category="TERMINAL BLOCK", Supplier 1=Digi-Key
F1 F2 F3 F4: Manufacturer=--, Manufacturer Part Number="Fiducial 2mm", Category=MECHANICAL, Mount="NO MOUNT", Purpose Of Usage=BASIC, Stock ID=??, Sub-Category=FIDUCIAL
H1 H2 H3 H4: library part "2.5 mm Hole", "2.5mm hole", Manufacturer=--, Category=MECHANICAL, Manufacturer Part Number=--, Mount="NO MOUNT", Purpose Of Usage=BASIC, Stock ID=??, Sub-Category=HOLE
IC1: "USB Interface IC USB to Basic Serial UART IC SSOP-16", Case/Package=SSOP, Manufacturer=FTDI, Package Quantity=100, Supplier Part Number 1=768-1154-5-ND, Category="INTEGRATED CIRCUITS", Lead Free="Lead Free", Manufacturer Part Number=FT230XS-U, Mount=SMD, Purpose Of Usage=BASIC, RoHS=YES, Stock 1=4799, Stock ID=??, Sub-Category="USB to UART", Supplier 1=Digi-Key
IC2_RS422 IC2_RS485: "3.0 V to 5.5 V, ±12 kV IEC ESD Protected, Half Duplex 50 Mbps RS-485 Transceiver", Case/Package=SOIC, Manufacturer="Analog Devices", Max Operating Temperature=85°C, Max Supply Voltage=5.5V, Min Operating Temperature=-40°C, Min Supply Voltage=3V, Supplier Part Number 1=505-ADM3065EARZ-R7TR-ND, Category="INTEGRATED CIRCUITS", Lead Free="Lead Free", Manufacturer Part Number=ADM3065EARZ-R7, Mount=SMD, MSL=1, Purpose Of Usage=BASIC, RoHS=YES, Stock ID=??, Sub-Category="RS485 DRIVER", Supplier 1=Digi-Key
IC3: "MC74VHC1G08 Series 2 to 5.5 SMT Single 2 Input AND Gate - SOT-23-5", Case/Package=SOT-23-5, Manufacturer="ON Semiconductor", Max Operating Temperature=125°C, Max Supply Voltage=5.5V, Min Operating Temperature=-55°C, Min Supply Voltage=2V, Package Quantity=1, Supplier Part Number 1=MC74VHC1G08DTT1GOSTR-ND, Category="INTEGRATED CIRCUITS", Lead Free="Lead Free", Manufacturer Part Number=MC74VHC1G08DTT1G, Mount=SMD, MSL=1, Purpose Of Usage=BASIC, RoHS=YES, Stock ID=??, Sub-Category=LOGIC, Supplier 1=Digi-Key
IC4_CH_1 IC4_CH_2: "WPME-CDIP Capacitive Digital Isolator Powered", Case/Package=SOIC-16W, Manufacturer="Wurth Elektronik", Max Operating Temperature=125°C, Min Operating Temperature=-40°C, Supplier Part Number 1=732-18024115401HTR-ND, Category="INTEGRATED CIRCUITS", Lead Free="Lead Free", Manufacturer Part Number=18024115401H, Mount=SMD, MSL=1, Purpose Of Usage=BASIC, RoHS=YES, Stock ID=??, Sub-Category=ISOLATOR, Supplier 1=Digi-Key
IC5_RS422 IC5_RS485: "1 FORM A SOLID STATE RELAY Transistor Output SSR, 1-Channel, 3750V Isolation", Case/Package=SOP, Manufacturer=Vishay, Max Operating Temperature=85°C, Max Supply Voltage=1.4V, Min Operating Temperature=-40°C, Supplier Part Number 1=VO1400AEFTR-ND, Category="INTEGRATED CIRCUITS", Lead Free="Lead Free", Manufacturer Part Number=VO1400AEFTR, Mount=SMD, MSL=1, Purpose Of Usage=BASIC, RoHS=YES, Stock ID=??, Sub-Category="SOLID STATE RELAY", Supplier 1=Digi-Key
IC6: "Linear Voltage Regulator IC Positive Fixed 1 Output 250mA SOT-23-5", Case/Package=SOT-23-5, Manufacturer=TEXAS, Max Operating Temperature=+125, Max Supply Voltage=5.5V, Min Operating Temperature=-40, Min Supply Voltage=3.6V, Package Quantity=3000, Supplier Part Number 1=296-38557-2-ND, Category="INTEGRATED CIRCUITS", Lead Free="Lead Free", Manufacturer Part Number=LP5907MFX-3.3/NOPB, Mount=SMD, MSL=1, Purpose Of Usage=BASIC, RoHS=YES, Stock 1=5836, Stock ID=??, Sub-Category="PMIC - LINEAR REGULATOR", Supplier 1=Digi-Key, Topology=LDO
L1: library part 744773047, "WE-PD2, Unshielded Wire-wound SMD Inductor With Ferrite Core, 4.7 Uh, 1.82A I", Case/Package=SMD/SMT, Current Rating=1.82A, DC Resistance (DCR)=59mΩ, Manufacturer="Wurth Elektronik", Max Operating Temperature=125°C, Min Operating Temperature=-40°C, Saturation Current=2.9A, Self Resonant Frequency=45MHz, Supplier Part Number 1=732-1252-1-ND, Test Frequency=10kHz, Inductance Tolerance=20%, Category=INDUCTORS, Height=3.2mm, Length=4mm, Manufacturer Part Number=744773047, Max DC Current=1.82A, Mount=SMD, RMS Current (Irms)=1.82A, RoHS=YES, Shielding=Unshielded, Stock ID=??, Sub-Category="FIXED INDUCTORS", Supplier 1=Digi-Key
LED1: "LED GREEN CLEAR CHIP SMD", Case/Package=0805, Color=Green, Manufacturer="Vishay Lite-On", Max Operating Temperature=85°C, Min Operating Temperature=-55°C, Supplier Part Number=160-1423-1-ND, Category=DIODE, Manufacturer Part Number=LTST-C171GKT, Mount=SMD, Purpose Of Usage=BASIC, RoHS=YES, Stock ID=??, Sub-Category=LED, Supplier 1=Digi-Key, Supplier Part Number 1=160-1423-1-ND
LED2 LED4: "LED RED CLEAR SMD", Case/Package=0805, Color=Red, Manufacturer="Vishay Lite-On", Max Operating Temperature=85°C, Min Operating Temperature=-55°C, Supplier Part Number 1=160-1427-1-ND, Category=DIODE, Manufacturer Part Number=LTST-C171KRKT, Mount=SMD, Purpose Of Usage=BASIC, RoHS=YES, Stock ID=??, Sub-Category=LED, Supplier 1=Digi-Key
LED3: "LED BLUE CLEAR CHIP SMD", Case/Package=0805, Color=Blue, Manufacturer="Vishay Lite-On", Max Operating Temperature=80°C, Min Operating Temperature=-20°C, Supplier Part Number 1=160-1645-1-ND, Category=DIODE, Manufacturer Part Number=LTST-C171TBKT, Mount=SMD, Purpose Of Usage=BASIC, RoHS=YES, Stock ID=??, Sub-Category=LED, Supplier 1=Digi-Key
LOGO1 LOGO3: "ESD LOGO", Manufacturer=--, Category=MECHANICAL, Manufacturer Part Number=ESD, Mount="NO MOUNT", Purpose Of Usage=BASIC, Stock ID=??, Sub-Category=LOGO
LOGO2: "Etiket kutu", Manufacturer=--, Category=MECHANICAL, Manufacturer Part Number=Etiket, Mount="NO MOUNT", Purpose Of Usage=BASIC, Stock ID=??, Sub-Category=LOGO
MCH1 MCH2 MCH3 MCH4: "Bivar straight light guide, rigidity, PCBinstall, 4.1 x 4.1 x 10.2mm", Manufacturer=Bivar, Supplier Part Number 1=492-1516-ND, Category=MECHANICAL, Element Configuration=Single, Length=10.16mm, Local Supplier=Bivar, Manufacturer Part Number=VLP-400-F, Material="PC, Polycarbonate", Mount=MECH, Mounting Technology=PCB, Purpose Of Usage=BASIC, RoHS=YES, Stock ID=??, Sub-Category="LED PIPE", Supplier 1=Digi-Key
PCB1: library part PCB, "PCB", Manufacturer=CUSTOM, Category=MECHANICAL, Local Supplier=CUSTOM, Manufacturer Part Number=CUSTOM, Mount=MECH, Price 10K=0.25, Purpose Of Usage=BASIC, Stock ID=??, Sub-Category=PCB, Supplier 1=CUSTOM, Supplier Part Number 1=CUSTOM
R1 R2: library part RC0402FR-075K1L, "5.1K, %1, 1/16W, 0402", Case Code (Imperial)=0402, Manufacturer=YAGEO, Max Operating Temperature=155°C, Max Power Dissipation=63mW, Min Operating Temperature=-55°C, Power Rating=62.5mW, Supplier Part Number 1=311-5.10KLRTR-ND, Temperature Coefficient=100ppm/°C, Tolerance=1%, Voltage Rating=50V, Case/Package=0402, Category=RESISTOR, Local Supplier=GENERAL, Manufacturer Part Number=RC0402FR-075K1L, Mount=SMD, Price 10K=0.0025, Purpose Of Usage=BASIC, RoHS=Compliant, Stock ID=??, Sub-Category="CHIP RESISTOR", Supplier 1=Digi-Key, Voltage Rating (DC)=50V, Working Voltage=50V
R3 R4 R5 R12: library part RC0603FR-07220RL, "220R, %1, 1/10W, 0603", Case Code (Imperial)=0603, Manufacturer=YAGEO, Max Operating Temperature=155°C, Max Power Dissipation=100mW, Min Operating Temperature=-55°C, Supplier Part Number 1=311-220HRCT-ND, Temperature Coefficient=100ppm/°C, Tolerance=1%, Voltage Rating=50V, Case/Package=0603, Category=RESISTOR, Local Supplier=GENERAL, Manufacturer Part Number=RC0603FR-07220RL, Mount=SMD, Power Rating=100mW, Price 10K=0.0025, Purpose Of Usage=BASIC, RoHS=YES, Stock ID=??, Sub-Category="CHIP RESISTOR", Supplier 1=Digi-Key, Voltage Rating (DC)=50V
R6_RS422 R6_RS485 R10_RS422 R10_RS485: library part RC0805JR-071KL, "1K, %5, 1/8W, 0805", Case Code (Imperial)=0805, Manufacturer=YAGEO, Max Operating Temperature=155°C, Max Power Dissipation=125mW, Min Operating Temperature=-55°C, Supplier Part Number 1=311-1.0KARCT-ND, Temperature Coefficient=100ppm/°C, Tolerance=5%, Voltage Rating=150V, Case/Package=0805, Category=RESISTOR, Local Supplier=GENERAL, Manufacturer Part Number=RC0805JR-071KL, Mount=SMD, Power Rating=125mW, Price 10K=0.0025, Purpose Of Usage=BASIC, RoHS=YES, Stock ID=??, Sub-Category="CHIP RESISTOR", Supplier 1=Digi-Key
R7_RS422 R7_RS485: library part RC0805JR-07120RL, "120R, %5, 1/8W, 0805", Case Code (Imperial)=0805, Manufacturer=YAGEO, Max Operating Temperature=155°C, Max Power Dissipation=125mW, Min Operating Temperature=-55°C, Supplier Part Number 1=311-120ARCT-ND, Temperature Coefficient=100ppm/°C, Tolerance=5%, Voltage Rating=150V, Case/Package=0805, Category=RESISTOR, Local Supplier=GENERAL, Manufacturer Part Number=RC0805JR-07120RL, Mount=SMD, Power Rating=125mW, Price 10K=0.0025, Purpose Of Usage=BASIC, RoHS=YES, Stock ID=??, Sub-Category="CHIP RESISTOR", Supplier 1=Digi-Key
R8_RS422 R8_RS485 R9_RS422 R9_RS485: library part RC0603FR-070RL, "0R ,%1 ,1/10 W ,0603", Case Code (Imperial)=0603, Manufacturer=YAGEO, Max Operating Temperature=155°C, Max Power Dissipation=100mW, Min Operating Temperature=-55°C, Supplier Part Number 1=311-0.0HRCT-ND, Temperature Coefficient=200ppm/°C, Tolerance=1%, Voltage Rating=50V, Working Voltage=75V, Case/Package=0603, Category=RESISTOR, Local Supplier=GENERAL, Manufacturer Part Number=RC0603FR-070RL, Mount=SMD, Power Rating=100mW, Price 10K=0.0025, Purpose Of Usage=BASIC, RoHS=YES, Stock ID=??, Sub-Category="CHIP RESISTOR", Supplier 1=Digi-Key, Supplier 2=JLCPCB, Supplier Part Number 2=C21189, Voltage Rating (DC)=50V
R11_RS422 R11_RS485: library part PAT0603E4000BST1, "400R, %0.1, 1/8W, 0603", Case Code (Imperial)=0603, Manufacturer="Vishay Dale Thin Film", Max Operating Temperature=155°C, Max Power Dissipation=150mW, Min Operating Temperature=-55°C, Temperature Coefficient=25ppm/°C, Tolerance=0.1%, Case/Package=0603, Category=RESISTOR, Local Supplier=GENERAL, Manufacturer Part Number=PAT0603E4000BST1, Mount=SMD, Power Rating=150mW, Purpose Of Usage=BASIC, RoHS=YES, Stock ID=??, Sub-Category="CHIP RESISTOR", Supplier 1=Digi-Key, Supplier Part Number 1=PAT0603E4000BST1
R13 R14 R15 R16: library part RT0603FRE0710KL, "10K, %1, 1/10W, 0603", Case Code (Imperial)=0603, Manufacturer=YAGEO, Max Operating Temperature=125°C, Max Power Dissipation=100mW, Min Operating Temperature=-55°C, Supplier Part Number 1=YAG2321CT-ND, Temperature Coefficient=50ppm/°C, Tolerance=1%, Voltage Rating=75V, Case/Package=0603, Category=RESISTOR, Local Supplier=GENERAL, Manufacturer Part Number=RT0603FRE0710KL, Mount=SMD, Power Rating=100mW, Price 10K=0.0025, Purpose Of Usage=BASIC, RoHS=YES, Stock ID=??, Sub-Category="CHIP RESISTOR", Supplier 1=Digi-Key, Supplier 2=JLCPCB, Supplier Part Number 2=C25804, Voltage Rating (DC)=75V
TBU1_RS422 TBU1_RS485 TBU2_RS422 TBU2_RS485: "A Single Bi-Directional, 650V, 200mA, 3-Pin DFN pkg TBU", Case/Package=DFN, Clamping Voltage=650V, Current Rating=200mA, Manufacturer=Bourns, Max Junction Temperature (Tj)=125°C, Min Operating Temperature=-55°C, Peak Pulse Current=400mA, Supplier Part Number 1=TBU-CA065-200-WHTR-ND, Voltage Rating=300V, Category=PROTECTION, China RoHS=Compliant, Direction=Bidirectional, Element Configuration=Single, ESD Protection=Yes, Height=1mm, Length=6.5mm, Lifecycle Status=Production, Local Supplier=GENERAL, Manufacturer Package Identifier=TBU-CA065-200-WH, Manufacturer Part Number=TBU-CA065-200-WH, Max Operating Temperature=125°C, Mount=SMD, Mounting Technology="Surface Mount", Number of Circuits=2, Number of Elements=1, Number of Terminals=3, Pins=12, Purpose Of Usage=BASIC, RoHS=YES, Stock ID=??, Sub-Category=TBU, Supplier 1=Digikey, Voltage Rating (DC)=650V, Working Voltage=300V
TISP1_RS422 TISP1_RS485 TISP2_RS422 TISP2_RS485: "TVS Thyristor, Bidirectional, 2 Pins, DO-214AA (SMB), Overvoltage Protector, 240 V, 1 Circuit", Breakdown Voltage=240V, Case/Package=SMB, Current Rating=5A, Forward Voltage=3V, Hold Current=350mA, Manufacturer=Bourns, Max Junction Temperature (Tj)=150°C, Min Operating Temperature=-40°C, Peak Pulse Current=220A, Category=PROTECTION, China RoHS=Non-Compliant, Export Control Classification Number (ECCN) Code=EAR99, Harmonized Tariff Schedule (HTS) Code=8541.30.00.80, Height=2.4mm, Lifecycle Status=Production, Local Supplier=GENERAL, Manufacturer Part Number=TISP4240M3BJR-S, Max Operating Temperature=150°C, Mount=SMD, Mounting Technology="Surface Mount", Number of Circuits=1, Number of Elements=1, Number of Terminals=2, Pins=2, Purpose Of Usage=BASIC, RoHS=YES, Stock ID=??, Sub-Category=TISP, Supplier 1=Digikey, Supplier Part Number 1=TISP4240M3BJR-S, Introduction Date=2005-05-05
TP1 TP2 TP3 TP4 TP5 TP6 TP7_CH_1 TP7_CH_2 TP8_RS422 TP8_RS485 TP9_CH_1 TP9_CH_2 TP10_RS422 TP10_RS485 TP11_CH_1 TP11_CH_2 TP12_CH_1 TP12_CH_2: "test ölçüm noktası", Manufacturer="NO BOM DEVICE", Category=CONNECTORS, Manufacturer Part Number="NO BOM DEVICE", Purpose Of Usage=BASIC, Stock ID=??, Sub-Category="TEST POINT"
TR1: "TRANS NPN 45V 0.1A SOT23", Case/Package=SOT-23-3, Manufacturer=Nexperia, Max Operating Temperature=150°C, Min Operating Temperature=-55°C, Supplier Part Number 1=1727-4855-1-ND, Category=TRANSISTOR, Local Supplier=OZDISAN, Manufacturer Part Number=BC847,215, Mount=SMD, Price 10K=0.021, Purpose Of Usage=BASIC, RoHS=NO, Stock ID=??, Sub-Category=NPN, Supplier 1=Digi-Key
TVS1_RS422 TVS1_RS485: "SM Series 12 V 400 W Asymmetrical TVS Diode for Extended Common-Mode - SOT-23", Breakdown Voltage=13.3V, Case/Package=SOT-23, Clamping Voltage=26V, Clamping Voltage-Max=12V, Leakage Current=1uA, Manufacturer=Semtech, Max Operating Temperature=125°C, Max Power Dissipation=400W, Max Reverse Leakage Current=20uA, Min Breakdown Voltage=7.5V, Min Operating Temperature=-55°C, Peak Pulse Current=17A, Supplier Part Number 1=SM712CT-ND, Category=PROTECTION, Direction=Bidirectional, ESD Protection=Yes, Lead Free="Lead Free", Length=2.9mm, Local Supplier=GENERAL, Manufacturer Part Number=SM712.TCT, Max Breakdown Voltage=13.3V, Mount=SMD, Mounting Technology="Surface Mount", Number of Bidirectional Channels=2, Number of Channels=2NUMBER, Number of Elements=2, Peak Pulse Power=400W, Pins=3, Polarity=Bidirectional, Power Dissipation=400W, Power Rating=400W, Price 10K=0.5, Purpose Of Usage=BASIC, RoHS=YES, Stock ID=??, Sub-Category="TVS - BI DIRECTIONAL", Supplier 1=Digikey, Voltage Rating (DC)=12V, Working Voltage=12V
TVS3: "WURTH ELEKTRONIK - 824015 - TVS Diode, 82401 Series, Bidirectional, 5 V, 13 V, SOT-23, 6 Pins", Case/Package=SOT-23-6, Clamping Voltage=7.8V, Manufacturer="Wurth Electronics", Max Operating Temperature=125°C, Min Operating Temperature=-55°C, Supplier Part Number 1=732-4467-1-ND, Category=DIODE, Direction=UNI, Manufacturer Part Number=824015, Mount=SMD, Purpose Of Usage=BASIC, RoHS=YES, Stock ID=??, Sub-Category=TVS, Supplier 1=Digi-Key

## Via types
v1: diameter 0.5, hole 0.3, Top Layer to Bottom Layer, tented both sides, 261 vias

## Nets (pads, with @x,y where several pads share a name; then routed paths per layer and width w, separated by ;. In a path a pad name is that pad's centre, name@x,y a point inside that pad or via, vN(x,y) a via of type N, cw(c..) or ccw(c..) an arc to the next point about the centre after c; other vN are vias at no path point)
+3V3: C7.2 C14.2 IC3.5 IC6.5 R3.2 R4.2 R5.2 R12.2 TP3.1 | length 51.8
  Top Layer w0.5: R5.2@8.75,8.63 v1(11.973,8.63) R12.2@13.169,8.63 ; IC6.5@12.75,33.4 C14.2@14.5,33.4 ; TP3.1@14.5,35.3 C14.2@14.5,33.4 ; v1(15.662,33.4) C14.2@14.5,33.4 ; v1(17.825,16) 17.83,15.995 C7.2@19.2,15.995 19.203,15.998 20.85,15.998 IC3.5@20.853,16 ; R3.2@18.75,8.63 v1(20.013,8.63) R4.2@23.673,8.63
  Bottom Layer w0.5: v1(11.973,8.63) 16.2,8.63 ; v1(15.662,33.4) 16.192,32.87 16.192,16 ; v1(17.825,16) 16.2,16 16.2,8.63 ; v1(20.013,8.63) 16.2,8.63
+5V: C2.2 C3.2 C8.2 C9.2 C13.2 CON1.A4/B9 CON1.A9/B4 IC1.12 IC6.1 IC6.3 L1.1 TP1.1 TVS3.5 | length 32.3
  Top Layer w0.25: v1(8.995,27.4) 8.995,30.354 9.142,30.5 20.148,30.5 C2.2@21.418,30.5 ; IC1.12@21.418,27.353 C2.2@21.418,30.5 ; C2.2@21.95,30.5 C2.2@21.418,30.5
  Top Layer w0.5: CON1.A9/B4@7.805,22.6 v1(8.995,22.6) ; CON1.A4/B9@7.805,27.4 v1(8.995,27.4) ; IC6.1@10.35,33.4 C13.2@10.35,35.125 ; v1(12.2,22.4) TVS3.5@12.2,23.35
  Bottom Layer w0.5: v1(8.995,27.4) v1(8.995,22.6) 9.195,22.4 v1(12.2,22.4)
___RS485_RS422_N: CON3.4 TBU2_RS422.2 TISP2_RS422.2 TP10_RS422.1
___RS485_RS422_P: CON3.1 TBU1_RS422.2 TISP1_RS422.2 TP8_RS422.1
___RS485_RS485_N: CON2.4 TBU2_RS485.2 TISP2_RS485.2 TP10_RS485.1
___RS485_RS485_P: CON2.1 TBU1_RS485.2 TISP1_RS485.2 TP8_RS485.1
__RS485_RS422_N: CM1_RS422.4 TBU2_RS422.1 TVS1_RS422.2 | length 14.8
  Top Layer w0.381: TVS1_RS422.2@62.05,7.05 62.05,7.3 62.31,7.56 62.459,7.56 62.683,7.783 62.683,10.711 64.289,12.317 67.779,12.317 ; CM1_RS422.4@66.75,13.27 67.146,13.27 67.555,12.86 67.555,12.541 67.779,12.317 ; TBU2_RS422.1@69.437,14.537 TBU2_RS422.1@69.475,14.575 ; TBU2_RS422.1@69.475,14.5 68.875,13.9 68.875,12.541 68.651,12.317 67.779,12.317
__RS485_RS422_P: CM1_RS422.3 TBU1_RS422.1 TVS1_RS422.1 | length 13.8
  Top Layer w0.381: TVS1_RS422.1@63.95,7.05 63.95,7.3 63.691,7.56 63.541,7.56 63.318,7.783 63.318,10.448 64.552,11.682 67.779,11.682 ; CM1_RS422.3@66.75,10.73 67.146,10.73 67.555,11.14 67.555,11.459 67.779,11.682 ; TBU1_RS422.1@69.45,9.475 TBU1_RS422.1@69.475,9.45 ; TBU1_RS422.1@69.475,9.5 68.875,10.1 68.875,11.459 68.651,11.682 67.779,11.682
__RS485_RS485_N: CM1_RS485.4 TBU2_RS485.1 TVS1_RS485.2 | length 12.8
  Top Layer w0.381: TVS1_RS485.2@63.95,42.95 63.95,42.7 63.691,42.44 63.541,42.44 63.318,42.217 63.318,39.64 64.64,38.318 66.487,38.318 ; CM1_RS485.4@66.75,39.27 66.487,39.007 66.487,38.318 ; TBU2_RS485.1@69.475,40.5 69.475,39.725 68.068,38.318 66.487,38.318
__RS485_RS485_P: CM1_RS485.3 TBU1_RS485.1 TVS1_RS485.1 | length 13.8
  Top Layer w0.381: TVS1_RS485.1@62.05,42.95 62.05,42.7 62.31,42.44 62.459,42.44 62.683,42.217 62.683,39.377 64.377,37.683 66.487,37.683 ; CM1_RS485.3@66.75,36.73 66.487,36.993 66.487,37.683 ; TBU1_RS485.1@69.475,35.5 69.475,36.275 68.068,37.683 66.487,37.683
_RS485_RS422_N: C6_RS422.2 CM1_RS422.1 R9_RS422.2 | length 6.4
  Top Layer w0.381: R9_RS422.2@56.775,13 57.009,12.765 57.009,12.541 57.233,12.318 57.906,12.318 58.221,12.317 58.445,12.541 58.445,12.86 58.854,13.27 CM1_RS422.1@59.25,13.27 59,13.52 C6_RS422.2@59,16.06
_RS485_RS422_P: C5_RS422.1 CM1_RS422.2 R8_RS422.2 | length 6.4
  Top Layer w0.381: R8_RS422.2@56.775,11 57.009,11.235 57.009,11.459 57.233,11.683 57.643,11.683 58.221,11.682 58.445,11.459 58.445,11.14 58.854,10.73 CM1_RS422.2@59.25,10.73 59,10.48 C5_RS422.1@59,7.94
_RS485_RS485_N: C6_RS485.2 CM1_RS485.1 R9_RS485.2 | length 6.4
  Top Layer w0.381: R9_RS485.2@56.775,39 57.009,38.766 57.009,38.541 57.233,38.318 58.221,38.318 58.445,38.541 58.445,38.86 58.854,39.27 CM1_RS485.1@59.25,39.27 59.5,39.52 C6_RS485.2@59.5,42.06
_RS485_RS485_P: C5_RS485.1 CM1_RS485.2 R8_RS485.2 | length 6.4
  Top Layer w0.381: R8_RS485.2@56.775,37 57.009,37.235 57.009,37.459 57.233,37.683 58.221,37.683 58.445,37.459 58.445,37.14 58.854,36.73 CM1_RS485.2@59.25,36.73 59.5,36.48 C5_RS485.1@59.5,33.94